# EAGLE board AnalogModule-0.2 (EAGLE 7.6.0)
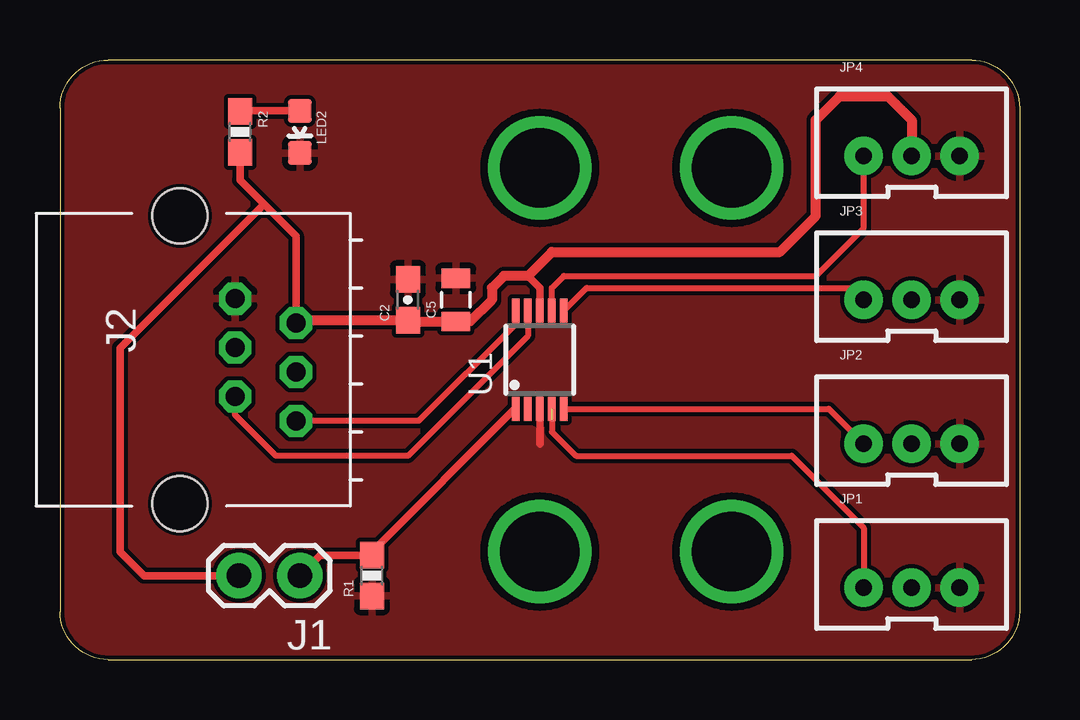
[diagram p0: board, top side]
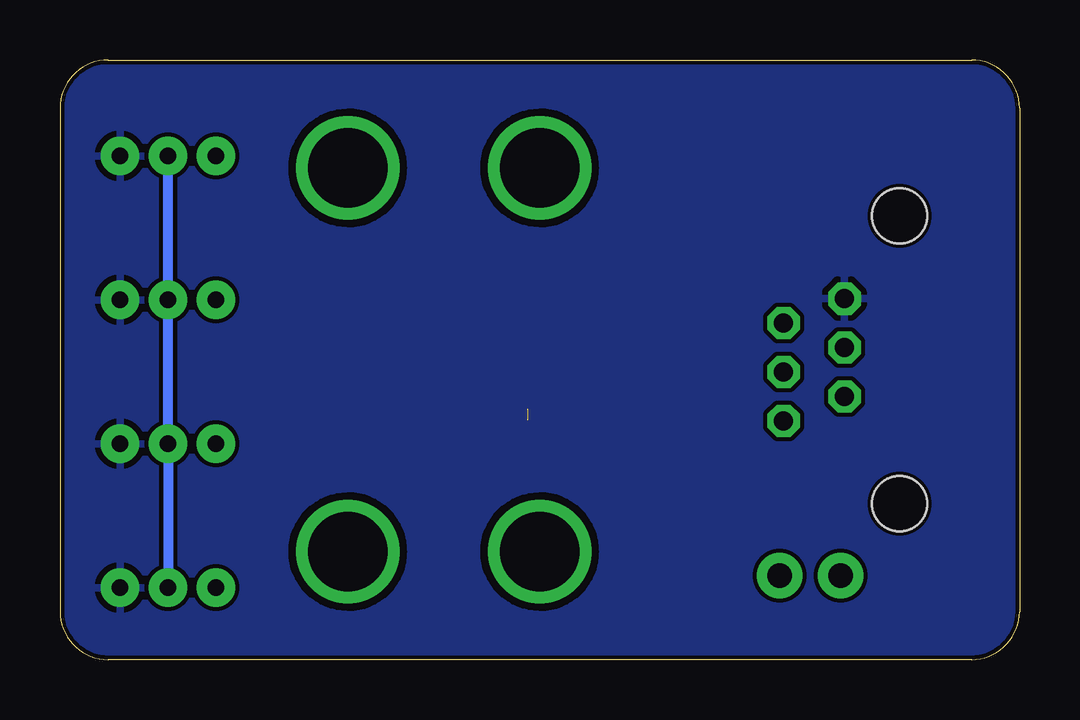
[diagram p1: board, bottom side, seen from below]

Size 40 x 25 mm. Coordinates in mm from the lower left corner, seen from the top.
Outline: 2,0 38,0 arc90 40,2 40,23 arc90 38,25 2,25 arc90 0,23 0,2 arc90 2,0
Copper layers (1*16): Top 0.035mm / dielectric 1.5mm / Bottom 0.035mm
Design rules "SparkFun-2-layer-TIGHT": minimum track width 7mil, minimum drill 15mil, track to track 7mil, track to pad 7mil, pad to pad 7mil, via to via 7mil, smd to smd 7mil, copper to edge 7mil, drill to drill 7mil, minimum pad ring 7mil, minimum via ring 7mil, stop-mask expansion 4mil, vias tented up to drill 25mil, thermal gap 10mil

## Footprints (pad centres in the part's own frame; a part is rotated, then mirrored left to right if it is on the bottom)
0603-CAP = smd 1.1 x 1: 1 -0.85,0; 2 0.85,0
0805 = smd 0.8 x 1.2: 1 -0.9,0; 2 0.9,0
STAND-OFF-PLATED = drill 3.302: P$1 0,0
1X02 = drill 1.016 pad 1.88: 1 0,0; 2 2.54,0
RJ11-6P6C = drill 0.8 pad 1.35 octagon: 1 2.55,4.84; 2 1.53,2.3; 3 0.51,4.84; 4 -0.51,2.3; 5 -1.53,4.84; 6 -2.55,2.3 | hole 2.3: -6,0; 6,0
JST-3-PTH-VERT = drill 0.7 pad 1.6: 1 -2,0; 2 0,0; 3 2,0
LED-0603 = smd 1 x 1: A 0,-0.877; C 0,0.877
0603-RES = smd 1.1 x 1: 1 -0.85,0; 2 0.85,0
MSOP10 = smd 0.3 x 1: 1 -1,-2.05; 2 -0.5,-2.05; 3 0,-2.05; 4 0.5,-2.05; 5 1,-2.05; 6 1,2.05; 7 0.5,2.05; 8 0,2.05; 9 -0.5,2.05; 10 -1,2.05

## Placement (x,y rotation side)
C2  0.1uF  [0603-CAP]  14.5,15 90 top
C5  10uF  [0805]  16.5,15 90 top
H1  STAND-OFFPLATED  [STAND-OFF-PLATED]  20,20.5 0 top
H2  STAND-OFFPLATED  [STAND-OFF-PLATED]  20,4.5 0 top
H3  STAND-OFFPLATED  [STAND-OFF-PLATED]  28,20.5 0 top
H4  STAND-OFFPLATED  [STAND-OFF-PLATED]  28,4.5 0 top
J1  [1X02]  10,3.5 180 top
J2  [RJ11-6P6C]  5,12.5 270 top
JP1  Analog1  [JST-3-PTH-VERT]  35.5,3 0 top
JP2  Analog2  [JST-3-PTH-VERT]  35.5,9 0 top
JP3  Analog3  [JST-3-PTH-VERT]  35.5,15 0 top
JP4  Analog4  [JST-3-PTH-VERT]  35.5,21 0 top
LED2  RED  [LED-0603]  10,22 180 top
R1  10k  [0603-RES]  13,3.5 90 top
R2  470  [0603-RES]  7.5,22 270 top
U1  ADS1015  [MSOP10]  20,12.5 0 top

## Library data of the parts
C2 C5 = SparkFun-Capacitors
H1-H4 J1 J2 JP1-JP4 = Robotois
LED2 = SparkFun-LED; PROD_ID: DIO-00819
R1 R2 = SparkFun-Resistors
U1 = SparkFun-AnalogIC; PROD_ID: IC-12239

## Nets
A0: J1.1 R1.2 U1.1
GND: C2.2 C5.2 J2.6 JP1.3 JP2.3 JP3.3 JP4.3 LED2.C R1.1 U1.3
INT: U1.2
N$1: LED2.A R2.1
SCL: J2.1 U1.10
SDA: J2.2 U1.9
VCC: C2.1 C5.1 J1.2 J2.5 JP1.2 JP2.2 JP3.2 JP4.2 R2.2 U1.8
VO1: JP1.1 U1.4
VO2: JP2.1 U1.5
VO3: JP3.1 U1.6
VO4: JP4.1 U1.7

## Tracks (layer width: path | path; a pad name or v marks a point on that pad's centre or on a via)
A0
  Top 0.305: U1.1 18.95,10.45 13,4.5 R1.2 10.85,4.35 J1.1
GND
  Top 0.305: U1.3 20,9
  pour Top: -1,26 -1,-1 41,-1 41,26
  pour Bottom: -2,27 -2,-2 42,-2 42,27
N$1
  Top 0.305: R2.1 7.53,22.88 LED2.A
SCL
  Top 0.254: U1.10 19,14 14.95,9.95 J2.1
SDA
  Top 0.254: U1.9 19.5,13.5 14.5,8.5 9,8.5 7.3,10.2 J2.2
VCC
  Top 0.305: U1.8 20,15.5 19.5,16 | R2.2 7.5,20 8.5,19 | 8.5,19 9.84,17.66 J2.5 | J1.2 3.5,3.5 2.5,4.5 2.5,13 8.5,19
  Top 0.406: J2.5 9.96,14.15 C2.1 14.55,14.1 C5.1 17.1,14.1 18,15 18,15.5 18.5,16 19.5,16 20.5,17 30,17 31.5,18.5 31.5,22.5 32.5,23.5 34.5,23.5 35.5,22.5 JP4.2
  Bottom 0.406: JP4.2 JP3.2 JP2.2 JP1.2
VO1  (1 unrouted)
  Top 0.254: 20.5,10 20.5,9.5 21.5,8.5 30.5,8.5 33.5,5.5 JP1.1
VO2
  Top 0.254: U1.5 32.05,10.45 JP2.1
VO3
  Top 0.254: U1.6 21.95,15.5 33,15.5 JP3.1
VO4
  Top 0.254: U1.7 20.5,15.5 21,16 31.5,16 33.5,18 JP4.1